# Altium PCB PCB1.PcbDoc
Units mil, origin at the board's own origin, x right, y up, seen from the top; angles counter-clockwise.
Board outline 4900 x 2550 mil, 2 copper layers (Top Layer, Bottom Layer); 55 components, 56 nets, 222 pads, 16 vias.
Unrouted connection lines stored in the file: 1.
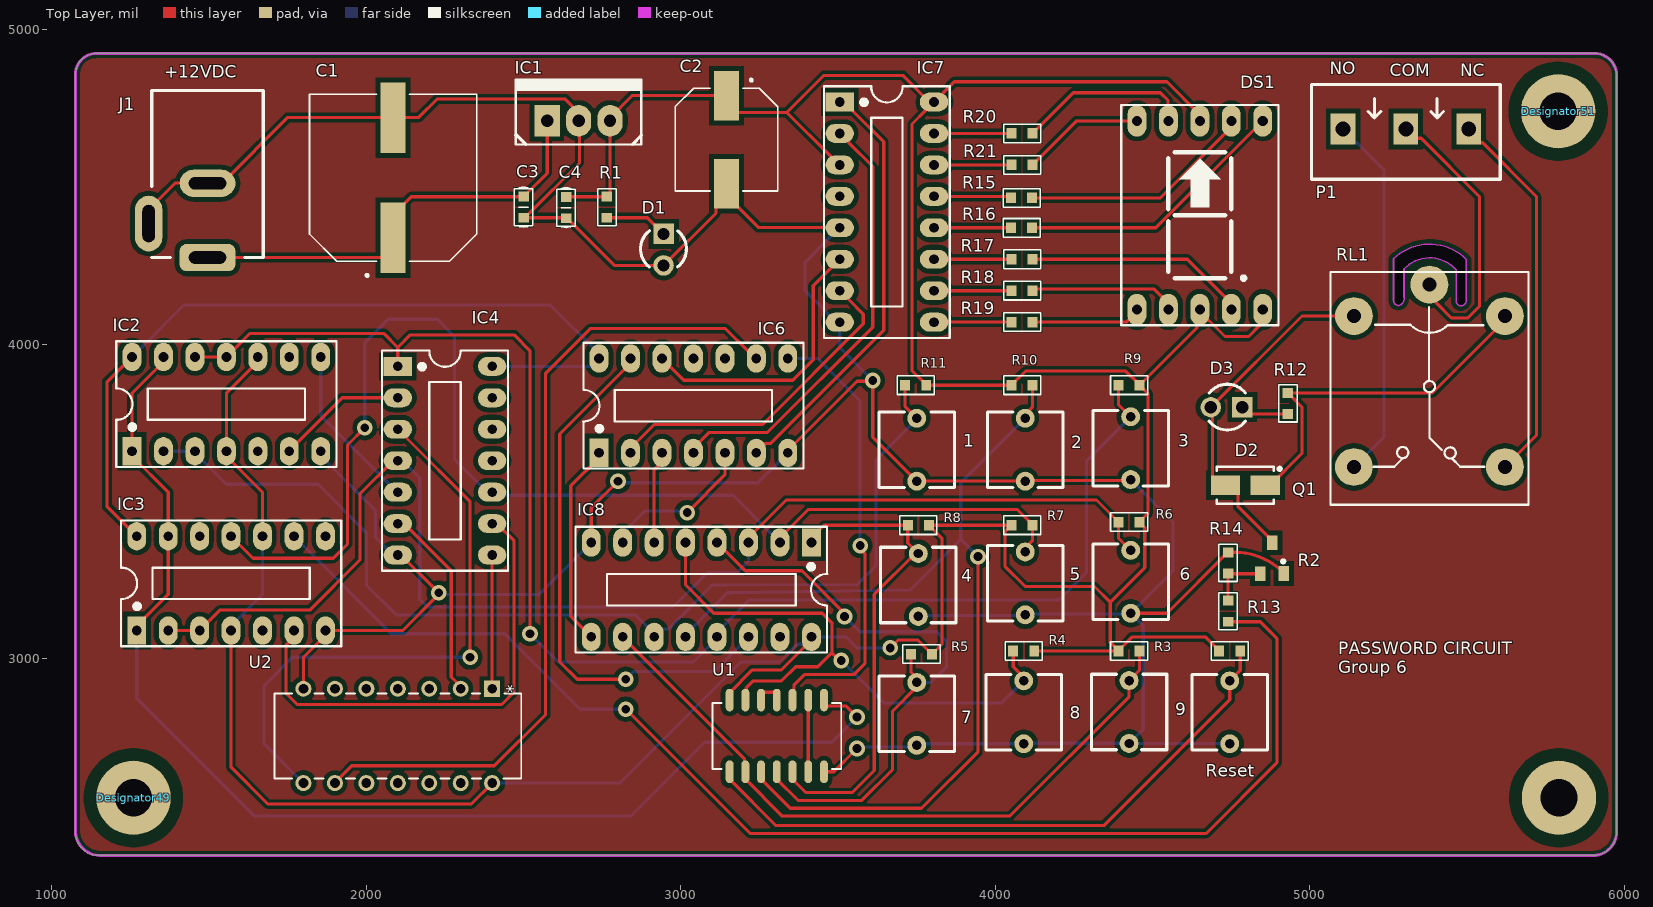
[diagram p0: Top Layer view]
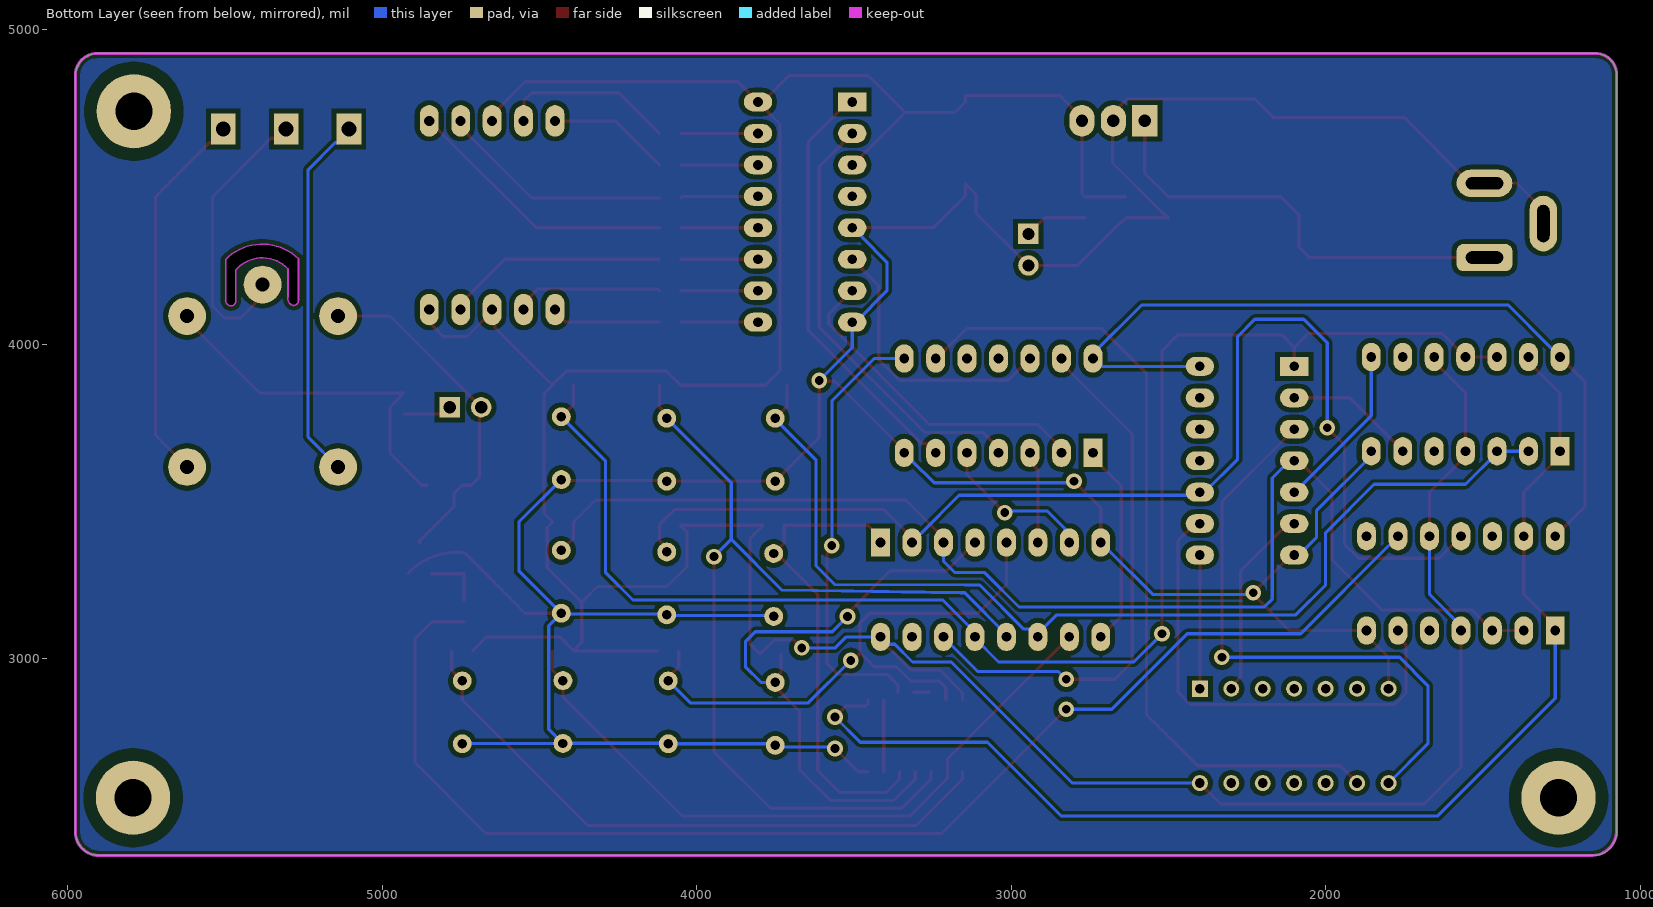
[diagram p1: Bottom Layer view, seen from below]
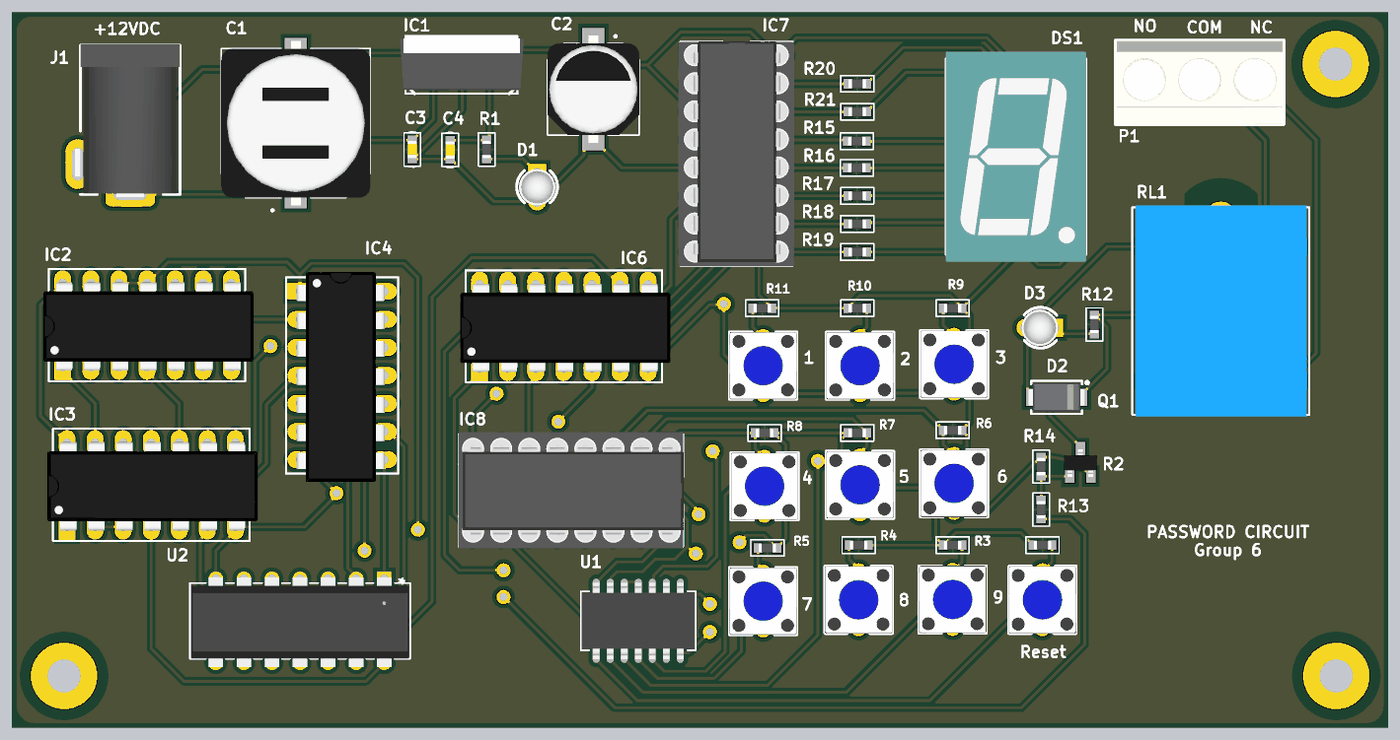
[diagram p2: 3D render of the assembled board from above, using the file's embedded part models]

## Layer stack, top to bottom
Top Solder: solder mask 0.4, Solder Resist, Dk 3.5
Top Layer: signal copper 1.4
Dielectric 1: dielectric 12.6, FR-4, Dk 4.8
Bottom Layer: signal copper 1.4
Bottom Solder: solder mask 0.4, Solder Resist, Dk 3.5

## Board outline
1075,2450 1075,4857.61 cw(c1142.39,4857.61) 1142.39,4925 5905,4925 cw(c5905,4855) 5975,4855 5975,2450 cw(c5900,2450) 5900,2375 1150,2375 cw(c1150,2450)
cut-out: 5265.7,4139.1 ccw(c5281.39,4139.1) 5281.39,4123.42 ccw(c5276.8,4145.64) 5299.02,4150.23 5299.02,4239.13 5299.07,4239.54 cw(c5380.81,4163.06) 5465.47,4236.3 5464.82,4235.74 5464.82,4139.98 ccw(c5480.86,4138.35) 5482.49,4122.31 ccw(c5479.54,4140.25) 5497.49,4143.2 5497.49,4269.95 5497.11,4269.95 ccw(c5380.45,4154.83) 5265.88,4272.03 5265.7,4272.03

## Design rules (kind name [scope] priority, off if disabled: settings)
Clearance [All] p1: gap=10 ignorepadtopadclearanceinfootprint=FALSE except(0: Arc-Hole Track-Hole SMDPad-Hole THPad-Hole Via-Hole Fill-Hole Poly-Hole Region-Hole Text-Hole; 15: SMDPad-SMDPad SMDPad-THPad SMDPad-Via SMDPad-Fill SMDPad-Poly SMDPad-Region THPad-THPad THPad-Via THPad-Fill THPad-Poly THPad-Region Via-Via Via-Fill Via-Poly Via-Region Fill-Fill Fill-Poly Fill-Region Poly-Poly Poly-Region Region-Region)
PolygonConnect [All] p1: connectstyle=Relief reliefconductorwidth=10 reliefentries=4 polygonreliefangle="90 Angle" airgapwidth=10
RoomDefinition Sheet1 [InComponentClass('Sheet1')] p1: confinementstyle=ConfineIn formatcopy=TRUE lockcomponents=FALSE outline 1080,2380 5970,2380 5970,4920 1080,4920
RoutingVias [All] p1: holewidth=28 width=50 viastyle="Through Hole" minholewidth=28 minwidth=50 maxholewidth=28 maxwidth=50
SolderMaskExpansion [All] p1: expansion=4 istentingtop=FALSE
Width [All] p1: maxlimit=20 minlimit=10 preferedwidth=10 minimp=50.000000 maximp=50.000000 favimp=50.000000
30 further rules are at their usual default settings.

## Classes and differential pairs
component class Sheet1: 1 2 3 4 5 6 7 8 9 C1 C2 C3 C4 D1 D2 D3 DS1 IC1 IC2 IC3 IC4 IC7 IC8 J1 P1 Q1 R1 R2 R3 R4 R5 R6 R7 R8 R9 R10 R11 R12 R13 R14 R15 R16 R17 R18 R19 R20 R21 Reset U1 U2

## Components (designator, comment, footprint, x,y, rotation, side; value= is the part's Value field where it differs from the comment)
1 "Button" Button 3750,3660 r90 top
2 "Button" Button 4095,3660 r90 top
3 "Button" Button 4430,3665 r90 top
4 "Button" Button 3755,3230 r90 top
5 "Button" Button 4095,3235 r90 top
6 "Button" Button 4430,3240 r90 top
7 "Button" Button 3750,2820 r90 top
8 "Button" Button 4090,2825 r90 top
9 "Button" Button 4425,2826.04 r90 top
C1 "EEEFK1V681AQ" CAP_EEEFK1V681AQ 2085,4530 r90 top
C2 "220uF" CAP_EEEFP1A681AP 3145,4651.01 r270 top
C3 "0.22uF" "C 0603" 2500,4436.01 r270 top
C4 "0.1uF" "C 0603" 2635,4434.48 r270 top
D1 "Led" "LED 3MM - red" 2945,4301.01 r270 top
D2 "Diode" "DO-214AC (SMA)" 4795,3552.05 r0 top
D3 "Led" "LED 3MM - red" 4735,3800 r180 top
Designator49 "Comment" SCREW/3.0/6.0 1259.47,2558.26 r0 top
Designator51 "Comment" SCREW/3.0/6.0 5789.08,4740.9 r0 top
DS1 "7SEG S" 7SEGS 4450,4110.55 r0 top value="LED 7S SEG"
IC1 "LM7805" QTO-220 2575,4711.01 r0 top
IC2 "74LS74" DIP14/W0.3 1255,3660 r0 top
IC3 "74LS74" DIP14/W0.3 1270,3090 r0 top
IC4 "7408" DIP14/W0.3 2100,3930 r270 top
IC6 "7404" DIP14/W0.3 2740,3655 r0 top
IC7 "7447" DIP16/W0.3 3505,4770.55 r270 top value="7447 , 74247"
IC8 "74147" DIP16/W0.3 3415,3370 r180 top
J1 "CON DC PWR" CONN/DC/PWR/5.0MM 1495,4275.83 r270 top (schematic designator CON1)
P1 "Domino 3" "DOMINO 3-5mm" 5505,4685 r180 top
Q1 "C1815" SOT23B 4880,3320 r0 top
R1 "330" "R 0603" 2765,4436.01 r90 top
R2 "510" "R 0603" 4745,3025 r180 top
R3 "510" "R 0603" 4425,3025 r180 top
R4 "510" "R 0603" 4090,3025 r0 top
R5 "510" "R 0603" 3765,3015 r0 top
R6 "510" "R 0603" 4425,3435 r0 top
R7 "510" "R 0603" 4085,3425 r180 top
R8 "510" "R 0603" 3755,3425 r0 top
R9 "510" "R 0603" 4425,3870 r0 top
R10 "510" "R 0603" 4085,3870 r180 top
R11 "510" "R 0603" 3746.54,3870 r0 top
R12 "300" "R 0603" 4930,3812.05 r90 top
R13 "3.9k" "R 0603" 4740,3151.54 r90 top
R14 "39k" "R 0603" 4740,3305 r270 top
R15 "100" "R 0603" 4083.46,4465.55 r0 top
R16 "100" "R 0603" 4083.46,4370.55 r0 top
R17 "100" "R 0603" 4085,4270.55 r0 top
R18 "100" "R 0603" 4085,4170.55 r0 top
R19 "100" "R 0603" 4085,4070.55 r0 top
R20 "100" "R 0603" 4085,4670.55 r0 top
R21 "100" "R 0603" 4085,4570.55 r0 top
Reset "Button" Button 4745,2825 r90 top
RL1 "Relay 10A/12V" RL_SPDT_10A 5380,4190 r270 top value="Relay SPDT, 10A, 12V"
U1 "74LS11" SO14NB_TEX 3305,2755 r90 top
U2 "CD4075BEG4" N14_TEX 2400,2905 r270 top
? "Comment" SCREW/3.0/6.0 5791.67,2558.32 r0 top

## Footprints (in the part's own frame and the unit in brackets; to place one, negate y for a bottom-side part, rotate by r counter-clockwise, add the part's x,y. Pads: shape width x height; smd on the part's side, far side on the other; paste and mask are expansions set on the pad)
7SEGS [mil] "DIP 10 Leads; Body 12 x 15 mm; Pitch 0.5 mm"
  oval 60x100 hole 32: 1(0,0) 2(100,0) 3(200,0) 4(300,0) 5(400,0) 6(400,600) 7(300,600) 8(200,600) 9(100,600) 10(0,600)
  silkscreen extent -50,-50 450,650, body extent -50,-75 450,675, height 316
Button [mil]
  round 60 hole 30: 1(-95,0) 2(105,0)
  silkscreen extent -115,-120 125,120, body extent -115,-120 125,120, height 165
"C 0603" [mm] "Chip Capacitor, 2-Leads, Body 1.6x0.8mm, IPC Medium Density"
  rect 0.8x0.85 smd: 1(-0.85,0) 2(0.85,0)
  silkscreen extent -1.6,-0.75 1.6,0.75, body extent -0.8,-0.43 0.8,0.43, height 0.81
CAP_EEEFK1V681AQ [mm]
  rect 5.7x2 smd: 1(-4.85,0) 2(4.85,0)
  silkscreen extent -8,-6.75 6.75,6.75, body extent -7.45,-6.75 7.45,6.75, height 13.5
CAP_EEEFP1A681AP [mm]
  rect 4x2 smd: 1(-3.55,0) 2(3.55,0)
  silkscreen extent -4.9,-4.15 4.15,4.15, body extent -4.85,-4.15 4.85,4.15, height 10.2
CONN/DC/PWR/5.0MM [mm]
  rrect50% 2.2x4.5 hole 1 slot 3 at 90 deg: 1(0,0)
  oval 2.2x4.5 hole 1 slot 3 at 90 deg: 2(-6,0)
  oval 4.5x2.2 hole 1 slot 3 at 0 deg: 3(-2.75,-4.75)
  silkscreen extent -13.5,-4.5 0,4.5, body extent -13.58,-5 0.25,4.5, height 11.02
DIP14/W0.3 [mil] "14PIN, W 300mil, Pin to pin 100mil"
  rect 60x90 hole 31: 1(0,0)
  oval 60x90 hole 31: 2(100,0) 3(200,0) 4(300,0) 5(400,0) 6(500,0) 7(600,0) 8(600,300) 9(500,300) 10(400,300) 11(300,300) 12(200,300) 13(100,300) 14(0,300)
  silkscreen extent -50,-50 650,350, body extent -70,-12 680,302, height 145
DIP16/W0.3 [mil] "16 PIN, W 300mil, Pin to pin 100mil"
  rect 60x90 hole 31: 1(0,0)
  oval 60x90 hole 31: 2(100,0) 3(200,0) 4(300,0) 5(400,0) 6(500,0) 7(600,0) 8(700,0) 9(700,300) 10(600,300) 11(500,300) 12(400,300) 13(300,300) 14(200,300) 15(100,300) 16(0,300)
  silkscreen extent -50,-50 750,350, body extent -52,-57 752,356, height 299
"DO-214AC (SMA)" [mm] "Molded Diode, 2-Leads, Body 4.3x2.7mm, IPC Medium Density"
  rect 2.35x1.55 smd: 1(-1.6,0) 2(1.6,0)
  silkscreen extent -2.3,-1.5 2.89,1.5, body extent -2.6,-1.3 2.6,1.3, height 2.4
"DOMINO 3-5mm" [mm]
  rect 2x2.5 hole 1.2: 1(0,0) 2(5.08,0) 3(10.147,0)
  silkscreen extent -2.54,-3.58 12.7,4.06, body extent -2.42,-3.51 12.58,3.99, height 10
"LED 3MM - red" [mil]
  rect 65x65 hole 39: 1(-50,0)
  round 65 hole 39: 2(50,0)
  silkscreen extent -60,-73 55,72, body extent -66,-65 64,65, height 207
N14_TEX [mil]
  rect 51x51 hole 31 mask+0: 1(0,0)
  round 51 hole 31 mask+0: 2(0,-100) 3(0,-200) 4(0,-300) 5(0,-400) 6(0,-500) 7(0,-600) 8(300,-600) 9(300,-500) 10(300,-400) 11(300,-300) 12(300,-200) 13(300,-100) 14(300,0)
  silkscreen extent 15,-692 285,93, body extent -5,-687 315,87, height 205
QTO-220 [mil] "TO-220 - 1-2-3"
  rect 80x100 hole 39: 1(0,0)
  oval 80x100 hole 39: 2(100,0) 3(200,0)
  silkscreen extent -100,-76 300,130, body extent -119,-64 322,121, height 905
"R 0603" [mm] "Chip Resistor, 2-Leads, Body 1.6x0.8mm, IPC Medium Density"
  rect 0.8x0.85 smd: 1(-0.85,0) 2(0.85,0)
  silkscreen extent -1.5,-0.75 1.5,0.75, body extent -0.8,-0.4 0.8,0.4, height 0.5
RL_SPDT_10A [mil] "Relay SPDT, 5 pin, 10A,W 650mil, L 800mil, H 800mil"
  round 120 hole 45: 1(0,0) 2(580,240) 3(580,-240) 4(100,-240) 5(100,240)
  silkscreen extent -40,-315 700,315, body extent -46,-304 706,306, height 602
SCREW/3.0/6.0 [mm]
  round 6 hole 3: 1(0,0)
  Top Layer pour cut-out: -4,0 -3.696,1.531 -2.828,2.828 -1.531,3.695 0,4 0,4 1.531,3.695 2.828,2.828 3.695,1.531 4,0 4,0 3.696,-1.531 2.828,-2.828 1.531,-3.696 0,-4 0,-4 -1.531,-3.696 -2.828,-2.828 -3.696,-1.531 -4,0
  Bottom Layer pour cut-out: -4,0 -3.696,1.531 -2.828,2.828 -1.531,3.695 0,4 0,4 1.531,3.695 2.828,2.828 3.695,1.531 4,0 4,0 3.696,-1.531 2.828,-2.828 1.531,-3.696 0,-4 0,-4 -1.531,-3.696 -2.828,-2.828 -3.696,-1.531 -4,0
SO14NB_TEX [mil]
  oval 72x25 smd paste+0 mask+0: 1(-114,150) 2(-114,100) 3(-114,50) 4(-114,0) 5(-114,-50) 6(-114,-100) 7(-114,-150) 8(114,-150) 9(114,-100) 10(114,-50) 11(114,0) 12(114,50) 13(114,100) 14(114,150)
  silkscreen extent -105,-205 105,205, body extent -136,-200 136,200, height 67
SOT23B [mm] "SOT 23B"
  rect 0.85x1.2 smd: 1(0.94,-1.245) 2(0,1.25) 3(-0.95,-1.25)
  silkscreen extent 0.77,-0.38 1.02,-0.13, body extent -1.5,-1.3 1.5,1.2, height 1.06

## Part data
1 2 3 4 5 6 7 8 9 Reset: library part "SW SPST", "Tact switch 2 pin"
C1: "ìº¡ ì•Œë£¨ë¯¸ëŠ„ Lytic 680uF 35V 20 % (12.5 X 13.5mm) SMD 1100mA 5000h 105C ìžë™ì°¨ T / R", PACKAGE="RADIAL-2 Panasonic", Availability="Not in stock", Check_prices=https://www.snapeda.com/parts/EEEFK1V681AQ/Panasonic/view-part/4273057/?ref=eda, MF=Panasonic, MP=EEEFK1V681AQ, Price=None, SnapEDA_Link=https://www.snapeda.com/parts/EEEFK1V681AQ/Panasonic/view-part/4273057/?ref=snap
C2: library part EEEFP1A681AP, "CAPACITOR ALUM ELEC, 680UF, 10V, 20%, SMD; Product Range:PANASONIC - FP Series; Capacitance:680ÂµF; Capacitance Tolerance:Â± 20%; Voltage Rating:10V; Diameter:8mm; ESR:0.08ohm; Height:10.2mm; Life Time @ Temperature:2000 hours @ 105Â°C ;RoHS Compliant: Yes", PACKAGE="RADIAL-2 Panasonic", Availability="In Stock", Check_prices=https://www.snapeda.com/parts/EEE-FP1A681AP/Panasonic/view-part/?ref=eda, MF=Panasonic, MP=EEE-FP1A681AP, Price=None, Purchase-URL=https://pricing.snapeda.com/search/part/EEE-FP1A681AP/?ref=eda, SnapEDA_Link=https://www.snapeda.com/parts/EEE-FP1A681AP/Panasonic/view-part/?ref=snap
C3 C4: library part "Capacitor NP", "Capacitor non-pol"
D1 D3: "Typical LED"
D2: "Default Diode"
DS1: library part LED7S, "Single 7 Seg Dipslay"
IC1: library part LM78xx, "On ap +, from + 5 to + 24VDC"
IC2 IC3: library part 7474, "Dual D Flip-Flop", Copyright by=VanDungEvn@Gmail.com
IC4: "Quad 2-Input AND Gate"
IC6: "Hex Inverter", Code_IPC=SOIC127P600-14, ComponentLink1Description="Manufacturer Link", ComponentLink1URL=http://www.national.com/, ComponentLink2Description=Datasheet, ComponentLink2URL=http://www.fairchildsemi.com/ds/74/74F04.pdf
IC7: "BCD to 7-Segment Decoder/Driver"
IC8: "10-Line to 4-Line Priority Encoder", Copyright by=VanDungEvn@Gmail.com
J1: "DC input connector"
P1: "Domino 3-Pin", LatestRevisionDate=17-Jul-2002, LatestRevisionNote="Re-released for DXP Platform.", Publisher="Altium Limited"
Q1: "NPN 600mW, ECB"
R1 R2 R3 R4 R5 R6 R7 R8 R9 R10 R11 R12 R13 R14 R15 R16 R17 R18 R19 R20 R21: library part Resistor, "Resistor"
RL1: library part "Relay 1", "Relay SPDT,10A - 12VDC 5 Pin"
U1 U2: "No Description Available", Mfr_Name="Texas Instruments", Copyright="Copyright (C) 2021 Ultra Librarian. All rights reserved.", RefDes=RefDes, TYPE=DEV
  U1: Manufacturer_Part_Number=74LS11
  U2: Manufacturer_Part_Number=CD4075BEG4

## Via types
v1: diameter 50, hole 28, Top Layer to Bottom Layer, 16 vias

## Nets (pads, with @x,y where several pads share a name; then routed paths per layer and width w, separated by ;. In a path a pad name is that pad's centre, name@x,y a point inside that pad or via, vN(x,y) a via of type N, cw(c..) or ccw(c..) an arc to the next point about the centre after c; other vN are vias at no path point)
5V: C2.1 C4.1 DS1.3 DS1.5 DS1.8 IC1.3 IC2.4 IC2.10 IC3.4 IC3.10 IC7.3 IC7.16 IC8.16 R1.2 R2.2 R3.2 R4.2 R5.2 R6.2 R7.2 R8.2 R9.2 R10.2 R11.2 U1.14 U2.14 | length 12131.4
  Top Layer w10: IC3.4 1570,2655 1685.86,2539.14 2334.14,2539.14 U2.14 ; IC2.10 1655,3945 1555,3845 IC2.4 1555,3645 1670,3530 IC3.10 ; C4.1 2636.54,4469.48 R1.2 2775,4479.48 IC1.3 2775,4721.01 2844.76,4790.78 C2.1 3145,4771.41 3179.37,4737.04 3337.04,4737.04 ; U1.14 3155,2892.5 3227.5,2965 3320,2965 3415,3060 IC8.16 ; IC7.3 3503.53,4570.55 3474.95,4599.13 3337.04,4737.04 ; v1(3665.82,3035) 3690.82,3060 3753.06,3060 3786.33,3026.73 3787.72,3026.73 R5.2@3798.46,3015.98 ; R5.2 R5.2@3798.46,3015.98 ; R5.2@3798.46,3015.58 R5.2@3798.46,3015.98 ; IC7.16 IC7.16@3803.53,4770.55 ; IC7.16@3806.47,4770.55 3834.32,4798.4 3834.32,4799.87 3869.45,4835 4545.55,4835 4650,4730.55 DS1.8 ; R4.2 R3.2 R3.2@4391.54,3025.98 ; DS1.3@4650,4104.08 4678.12,4075.96 4679.05,4075.96 4730.01,4025 4805,4025 4840.43,4060.43 4840.43,4100.98 DS1.5 ; DS1.3 4640.43,4100.98 4640.43,4051.97 4470.2,3881.73 4469.21,3881.73 R9.2@4458.46,3870.98 ; R2.2 4711.54,3025.98 4667.52,3070 4435.55,3070 R3.2@4391.54,3025.98 ; 3337.04,4737.04 3455,4855 3705.55,4855 3790,4770.55 IC7.16@3803.53,4770.55 ; R5.2@3798.46,3015.98 3809.21,3026.73 3810.2,3026.73 3830,3046.54 3830,3383.46 3800.2,3413.27 3799.21,3413.27 3788.46,3424.02 R8.2 R7.2 4051.54,3424.02 4040.79,3413.27 4039.8,3413.27 4030,3403.46 4030,3295 4095,3230 4315,3230 4365,3180 ; IC7.16@3803.53,4770.55 3780.43,4747.45 3780.43,4745.98 3735,4700.55 3735,3915.98 3780,3870.98 R11.2 R10.2 4051.54,3870.98 4095.55,3915 4414.45,3915 R9.2@4458.46,3870.98 ; 4365,3180 4365,3052.52 R3.2@4391.54,3025.98 ; 4365,3180 4475,3290 4475,3417.48 4458.46,3434.02 R6.2 4459.23,3435.77 4459.23,3436.75 4485,3462.52 4485,3843.46 4470.2,3858.27 4469.21,3858.27 4458.46,3869.02 R9.2 R9.2@4458.46,3870.98
  Bottom Layer w10: IC3.4 1570,3105 1670,3205 IC3.10 ; U2.14 2805,2605 3190,2990 3313.64,2990 3370,3046.36 3391.9,3046.36 3415,3069.46 IC8.16 3523.64,3070 3558.64,3035 v1(3665.82,3035)
GND: 1.1 2.1 3.1 4.1 5.1 6.1 7.1 8.1 9.1 C1.2 C2.2 C3.2 C4.2 D1.2 IC1.2 IC2.7 IC3.7 IC4.7 IC6.7 IC7.5 IC7.8 IC8.8 J1.2 J1.3 Q1.1 R14.1 Reset.1 U1.7 U2.7 | length 11537.2
  Top Layer w10: J1.3 1307.99,4428.9 1391.72,4512.64 J1.2@1494.41,4512.64 ; J1.2@1495.59,4512.64 1541.33,4512.64 1750.23,4721.53 C1.2@2084.41,4721.53 ; U2.7 1800,3005 1870,3075 IC3.7 2115,3090 2230,3205 v1(2230,3210) 2110,3330 IC4.7 ; C1.2@2085.59,4721.53 2167,4721.53 2226.06,4780.59 2631.06,4780.59 2675,4736.64 IC1.2 2677.59,4708.42 2677.59,4576.56 2514.32,4413.3 2511.22,4413.3 C3.2@2500.47,4402.55 ; C3.2 2633.46,4402.55 C4.2 2645.75,4390.26 2649.32,4390.26 2788.58,4251.01 D1.2 ; IC8.8 2715,3480 v1(2800,3565) ; D1.2@2945.47,4251.01 3111.69,4417.23 3111.69,4477.47 C2.2@3145,4510.78 ; C2.2 C2.2@3145,4510.78 ; IC6.7 3340,3662.5 3560,3882.5 3607.5,3882.5 v1(3610,3885) 3610,3705 1.1 2.1 4097.5,3567.5 4427.5,3567.5 3.1 ; U1.7 3486,2641 v1(3560,2715) ; IC7.5@3504.41,4371.14 3247.38,4371.14 3181.01,4437.51 3179.37,4437.51 3145,4471.88 C2.2@3145,4510.78 ; 6.1 4545.55,3145 4739.02,3338.46 R14.1 4751.73,3339.14 cw(c4758.69,3115.77) 4904.64,3285 4905.27,3285 Q1.1
  Bottom Layer w10: IC2.7 1855,3645 2029.36,3470.64 2029.36,3385.64 2085,3330 IC4.7 ; v1(2230,3210) 2235,3205 2550,3205 2690.43,3345.43 2691.9,3345.43 2715,3368.53 IC8.8 ; v1(2800,3565) 2805,3560 3245,3560 3315.43,3630.43 3316.9,3630.43 3340,3653.53 IC6.7 ; IC7.5 3503.53,4370.55 3475.41,4342.43 3475.41,4341.5 3395,4261.09 3395,4170 3494.45,4070.55 IC7.8 3505,3990 v1(3610,3885) ; v1(3560,2715) 3565,2720 3745,2720 7.1 3755,2730 8.1 ; 4.1 3757.5,3137.5 4092.5,3137.5 5.1 4097.5,3142.5 4427.5,3142.5 6.1 ; 8.1@4090,2711.04 4110.8,2731.84 4423.07,2731.84 cw(c4423.07,2729.11) 9.1 ; 3.1 4565,3435 4565,3280 6.1 ; Reset.1@4742.83,2731.04 cw(c4742.83,2728.32) 4744.76,2730.24 Reset.1 4742.83,2730 4741.8,2731.04 9.1 ; 9.1 4470,2776.04 4470,3105 6.1
Net1_2: 1.2 IC2.2 IC2.3 IC8.11 R11.1 | length 3342.5
  Top Layer w10: R11.1 3713.07,3801.93 1.2
  Bottom Layer w10: IC2.2 IC2.3 1455,3655.49 1555.49,3555 1846.17,3555 2000,3401.17 2000,3235 2095,3140 2855,3140 2880.13,3114.87 IC8.11@2915,3080 ; IC8.11 2915,3071.47 2938.1,3094.57 2959.57,3094.57 3100.03,3235.03 3147.22,3235.03 3561.61,3236.92 3564.54,3239.85 3620.05,3295.35 3620.05,3631.92 3750,3761.87 1.2
Net2_2: 2.2 IC8.12 R10.1 U1.3 | length 3118.2
  Top Layer w10: U1.3 3255,2617.5 3347.5,2525 3765,2525 3945,2705 v1(3945,3325) ; 2.2@4090,3765 2.2 4095,3778.53 4118.46,3801.99 R10.1
  Bottom Layer w10: IC8.12 3015,3077.62 3147.38,3210 3160,3210 3728.5,3218.5 3890,3380 ; v1(3945,3325) 3890,3380 ; 2.2 3890,3560 3890,3380
Net3_2: 3.2 IC2.11 IC2.12 IC4.1 IC8.13 R9.1 | length 4718.8
  Top Layer w10: IC2.12 IC2.11 1555,3961.47 1578.1,3984.57 1579.57,3984.57 1630,4035 2055,4035 2100,3990 ; IC4.1 2100,3990 ; v1(2520,3080) 2520,3980 2470,4030 2140,4030 2100,3990 ; R9.1 4391.54,3808.46 3.2
  Bottom Layer w10: v1(2520,3080) 2610,2990 3040,2990 3115,3065 IC8.13 3115,3085 3217.28,3187.28 4202.28,3187.28 4290,3275 4290,3630 3.2
Net4_2: 4.2 IC8.1 R8.1 U1.5 | length 1525.9
  Top Layer w10: U1.5 3355,2617.5 3397.5,2575 3545,2575 3615,2645 3615,3205 3745,3335 4.2 3721.54,3368.46 R8.1 3455,3425 3415,3385 IC8.1
Net5_2: 5.2 IC3.11 IC3.12 IC4.10 IC8.2 R7.1 | length 3912.5
  Top Layer w10: IC3.11 1570,3388.53 1598.12,3360.41 1599.05,3360.41 1639.46,3320 1895,3320 1940,3365 1940,3680 v1(1995,3735) ; IC8.2 3315,3385 3405,3475 4069.45,3475 4118.46,3425.98 R7.1 4118.46,3376.99 4095,3353.53 5.2
  Bottom Layer w10: v1(1995,3735) 1995,4005 2070,4080 2225,4080 2280,4025 2280,3635 IC4.10@2385,3530 ; IC4.10 2409.57,3520.43 2445.42,3520.43 2445.86,3520 3165.54,3520 3285.95,3399.59 3286.88,3399.59 3315,3371.47 IC8.2
Net6_2: 6.2 IC3.2 IC3.3 IC4.4 IC8.3 R6.1 | length 4138.8
  Top Layer w10: IC3.2 IC3.3 1470,3091.47 1498.58,3120.05 1533.53,3155 1820,3155 1980,3315 1980,3525 2085,3630 IC4.4 ; IC8.3 3215,3385 3335,3505 4321.54,3505 R6.1 4391.54,3383.46 6.2 ; R6.1@4388.46,3435 R6.1@4388.46,3435.98
  Bottom Layer w10: IC4.4 2115,3630 2170,3575 2170,3190 2195,3165 2975,3165 3085,3275 3180,3275 3215,3310 IC8.3 3195.9,3350.9 IC8.3@3193.18,3348.18
Net7_2: 7.2 IC8.4 R5.1 U1.4 | length 1915.5
  Top Layer w10: IC8.4 3115,3368.53 3138.1,3345.43 3139.57,3345.43 3205,3280 3385,3280 3520,3145 v1(3520,3135) ; U1.4 3305,2617.5 3372.5,2550 3575,2550 3672.72,2647.72 3672.72,2833.75 7.2@3750,2911.04 ; R5.1 3731.54,2956.99 3750,2938.53 7.2
  Bottom Layer w10: v1(3520,3135) 3568.83,3086.17 3813.83,3086.17 3845,3055 3845,2975 3795,2925 7.2
Net8_2: 8.2 IC8.5 R4.1 U1.13 | length 1913.5
  Top Layer w10: IC8.5 3015,3235 3105,3145 3450,3145 3480,3115 3480,3020 ; U1.13 3207.87,2871.87 3207.87,2907.87 3222.01,2922.01 3230,2930 3320,2930 3365,2975 3405.57,2975 ; 3405.61,2975 3435,2975 3480,3020 ; v1(3510,2995) 3505,2995 3480,3020 ; R4.1 4056.54,2974.5 8.2@4095,2936.04
  Bottom Layer w10: v1(3510,2995) 3645,2860 4020,2860 8.2
Net9_2: 9.2 IC8.10 R3.1 U1.2 | length 2199
  Top Layer w10: IC8.10 2815,3068.53 3202.57,2680.96 3202.57,2619.93 3322.5,2500 4045,2500 4425,2880 9.2 4458.46,2964.5 R3.1
NetC1_1: C1.1 C3.1 IC1.1 J1.1 | length 1418
  Top Layer w10: J1.1 2050.63,4275.83 2085,4310.2 C1.1 2085,4411.89 2142.59,4469.48 C3.1 2500.98,4469.48 2511.73,4480.23 2511.73,4481.21 2575,4544.48 IC1.1
NetD1_1: D1.1 R1.1 | length 201.3
  Top Layer w10: R1.1 2893.46,4402.55 D1.1
NetD2_1: D2.1 D3.2 Q1.2 RL1.4 | length 1103.8
  Top Layer w10: Q1.2 4880,3376.1 4771,3485.1 4771,3526.54 4745.49,3552.05 4716.26,3552.05 4690.75,3577.56 4690.75,3794.25 D3.2 4975,4090 RL1.4
NetD2_2: D2.2 R12.2 RL1.5 | length 1164.4
  Top Layer w10: D2.2 4873.74,3552.05 4975,3653.31 4975,3800.51 4941.73,3833.78 4941.73,3834.77 R12.2@4930.98,3845.51 ; R12.2 R12.2@4930.98,3845.51 ; RL1.5@5626.47,4083.53 5388.46,3845.51 R12.2@4930.98,3845.51
NetD3_1: D3.1 R12.1 | length 153.9
  Top Layer w10: D3.1 4806.41,3778.59 R12.1
NetDS1_1: DS1.1 R19.2 | length 351.9
  Top Layer w10: R19.2 4416.47,4070.55 4450,4104.08 DS1.1
NetDS1_2: DS1.2 R18.2 | length 472.2
  Top Layer w10: R18.2 4123.46,4175.55 4505,4175.55 4550,4130.55 DS1.2
NetDS1_4: DS1.4 R17.2 | length 709.5
  Top Layer w10: R17.2 4610,4270.55 4750,4130.55 DS1.4
NetDS1_6: DS1.6 R16.2 | length 877.7
  Top Layer w10: R16.2 4510,4370.55 4820.43,4680.98 4826.9,4680.98 4850,4704.08 DS1.6
NetDS1_7: DS1.7 R15.2 | length 746.3
  Top Layer w10: R15.2 4525,4465.55 4750,4690.55 DS1.7
NetDS1_9: DS1.9 R20.2 | length 560
  Top Layer w10: R20.2 4118.46,4671.53 4129.21,4682.28 4130.2,4682.28 4247.91,4800 4524.14,4800 4548.59,4775.55 4548.59,4711.96 DS1.9
NetDS1_10: DS1.10 R21.2 | length 390.1
  Top Layer w10: R21.2 4118.46,4571.53 4129.21,4582.28 4130.2,4582.28 4258.46,4710.55 DS1.10
NetIC2_1: IC2.1 IC2.13 IC3.1 IC3.13 U1.8 | length 3925.4
  Top Layer w10: IC3.1 1270,3105 1370,3205 IC3.13 1370,3530 1255,3645 IC2.1 1255,3845 1355,3945 IC2.13 ; U1.8 3455,2857.43 3461.93,2850.5 3524.5,2850.5 v1(3560,2815)
  Bottom Layer w10: IC3.1 1270,2875 1645,2500 2840,2500 3075,2735 3480,2735 v1(3560,2815)
NetIC2_6: IC2.6 IC4.2 | length 416.3
  Top Layer w10: IC2.6 1755,3661.47 1923.53,3830 IC4.2
NetIC2_8: IC2.8 IC4.5 | length 532.3
  Bottom Layer w10: IC2.8 1855,3773.53 2098.53,3530 IC4.5
NetIC3_6: IC3.6 IC4.9 | length 1539.2
  Top Layer w10: IC3.6 1770,3069.64 1745,3044.64 1745,2890 1780,2855 2430,2855 2470,2895 2470,3375 2415,3430 IC4.9
NetIC3_9: IC3.9 R13.1 | length 4172.9
  Top Layer w10: v1@2831.75,2833.25 3220,2445 4670,2445 4895,2670 4895,3065 4841.93,3118.07 R13.1
  Bottom Layer w10: IC3.9 1770,3388.53 1798.12,3360.41 1799.05,3360.41 2079.46,3080 2440,3080 2680,2840 v1(2825,2840)
NetIC4_3: IC4.3 U2.8 | length 1875.2
  Top Layer w10: IC4.3 2101.47,3730 2124.57,3706.9 2124.57,3705.43 2330,3500 v1(2330,3005)
  Bottom Layer w10: U2.8 1675,2730 1675,2915 1765,3005 v1(2330,3005)
NetIC4_6: IC4.6 U2.2 | length 619.6
  Top Layer w10: IC4.6 2120,3430 2270,3280 2270,2942.28 2300,2912.28 U2.2
NetIC4_8: IC4.8 U2.1 | length 425
  Top Layer w10: U2.1 IC4.8
NetIC6_1: IC6.1 IC8.9 | length 649.2
  Top Layer w10: IC8.9 2650,3135 2650,3550 2740,3640 IC6.1
NetIC6_2: IC6.2 IC7.7 | length 1056.1
  Top Layer w10: IC6.2 2840,3670 2915,3745 3260,3745 3580,4065 3580,4096.09 3534.59,4141.5 3534.59,4142.43 3506.47,4170.55 IC7.7
NetIC6_3: IC6.3 IC8.6 | length 295.4
  Top Layer w10: IC8.6 2915,3601.47 2940,3626.47 IC6.3
NetIC6_4: IC6.4 IC7.2 | length 1404.5
  Top Layer w10: IC6.4 3040,3670 3090,3720 3275.25,3720 3610,4054.75 3610,4565.55 3534.32,4641.23 3534.32,4642.7 3506.47,4670.55 IC7.2
NetIC6_5: IC6.5 IC8.7 | length 505.8
  Top Layer w10: v1(3020,3465) 3140,3585 IC6.5
  Bottom Layer w10: IC8.7 2815,3398.53 2829.32,3412.85 2829.32,3414.32 2885,3470 3015,3470 v1(3020,3465)
NetIC6_6: IC6.6 IC7.1 | length 1359.7
  Top Layer w10: IC6.6 3240,3656.47 3267.85,3684.32 3284.32,3684.32 3645,4045 3645,4643.66 3545,4743.66 3545,4745.55 3520,4770.55 IC7.1
NetIC6_8: IC6.8 U1.10 | length 1403.6
  Top Layer w10: U1.10@3360,2894 3360,2917.5 3392.5,2950 3550,2950 3585,2985 3585,3334.18 3570,3349.18 v1(3570,3360)
  Bottom Layer w10: IC6.8 3435,3955 3570,3820 v1(3570,3360)
NetIC6_9: IC6.9 U2.9 | length 2615.3
  Top Layer w10: U2.9 1900,2606.64 1953.45,2660.09 2406.97,2660.09 2570,2823.12 2570,3908.12 2711.88,4050 3142.06,4050 3212.49,3979.57 3216.9,3979.57 3240,3956.47 IC6.9
NetIC6_12: IC6.12 IC7.6 | length 894.6
  Top Layer w10: IC6.12 2940,3953.53 2963.1,3930.43 2964.57,3930.43 3009.34,3885.66 3355.81,3885.66 3420.81,3950.66 3420.81,4186.21 3481.24,4246.65 3481.24,4248.12 3499.67,4266.54 3499.67,4270.55 IC7.6@3504.34,4271.21
NetIC6_13: IC6.13 IC8.14 | length 1737.8
  Top Layer w10: v1(2825,2935) 2670,2935 2615,2990 2615,3715 2840,3940 IC6.13
  Bottom Layer w10: v1(2825,2935) 2850,2960 3106.47,2960 3215,3068.53 IC8.14
NetIC7_9: IC7.9 R19.1 | length 246.5
  Top Layer w10: IC7.9 R19.1
NetIC7_10: IC7.10 R18.1 | length 246.5
  Top Layer w10: IC7.10 R18.1
NetIC7_11: IC7.11 R17.1 | length 246.5
  Top Layer w10: IC7.11 R17.1
NetIC7_12: IC7.12 R16.1 | length 245
  Top Layer w10: IC7.12 R16.1
NetIC7_13: IC7.13 R15.1 | length 247.1
  Top Layer w10: IC7.13 4045,4470.55 R15.1
NetIC7_14: IC7.14 R21.1 | length 246.5
  Top Layer w10: IC7.14 R21.1
NetIC7_15: IC7.15 R20.1 | length 246.5
  Top Layer w10: IC7.15 R20.1
NetP1_1: P1.1 RL1.2 | length 1219
  Top Layer w10: P1.1@5499.51,4690.49 5499.51,4680.65 5539.37,4640.79 5549.21,4640.79 5720,4470 5720,3710 RL1.2
NetP1_2: P1.2 RL1.1 | length 912.3
  Top Layer w10: P1.2 5334.68,4655.32 5353.51,4655.32 5539.22,4469.61 5539.22,4121 5501.82,4083.6 5449.74,4083.6 5401.05,4132.29 5401.05,4168.95 RL1.1
NetP1_3: P1.3 RL1.3 | length 1173.8
  Bottom Layer w10: P1.3 5105.5,4675.16 5139.87,4640.79 5149.71,4640.79 5235,4555.5 5235,3705 RL1.3
NetQ1_3: Q1.3 R13.2 R14.2 | length 189.4
  Top Layer w10: R13.2 R14.2 4740.75,3270.79 Q1.3
NetR2_1: R2.1 Reset.2 U1.1 | length 2009.1
  Top Layer w10: U1.1 3155,2617.5 3302.5,2470 4345,2470 4745,2870 Reset.2 4778.46,2963.46 R2.1
NetU1_6: U1.6 U1.9 | length 228
  Top Layer w10: U1.6 U1.9
NetU1_11: U1.11 U1.12 | length 50
  Top Layer w10: U1.12@3260,2894 U1.11@3310,2894
VCC: IC2.14 IC3.14 IC4.14 IC6.14 | length 2628
  Top Layer w10: IC2.14 1255,3958.53 1227.15,3930.68 1225.68,3930.68 1175,3880 1175,3485 IC3.14
  Bottom Layer w10: IC2.14 1255,3961.47 1283.12,3989.59 1284.05,3989.59 1419.46,4125 2585,4125 2740,3970 IC6.14 2740,3953.53 2716.47,3930 IC4.14
pads on no net: ?.1 Designator49.1 Designator51.1 IC2.5 IC2.9 IC3.5 IC3.8 IC4.11 IC4.12 IC4.13 IC6.10 IC6.11 IC7.4 IC8.15 U2.3 U2.4 U2.5 U2.6 U2.10 U2.11 U2.12 U2.13

## Polygon pours and split planes (outlines as drawn)
no net on Top Layer "TOP_GND" (solid, pour order 1): 1081.67,4923.53 1081.88,4923.32 5981.22,4923.32 5981.22,2379.76 5977.52,2376.06 1078.94,2376.06 1078.94,4920.8
no net on Bottom Layer "TOP_GND" (solid, pour order 0): 1086.34,4934.41 1097.43,4923.32 5981.22,4923.32 5981.22,2387.15 5984.91,2383.46 5977.52,2376.06 1078.94,2376.06 1078.94,4920.87 1078.98,4920.83 1081.67,4923.53 1097.84,4923.53

## Keep-outs
Keep-Out Layer:
  lines w5: 5265.7,4272.03 5265.7,4139.1 ccw(c5281.39,4139.1) 5281.39,4123.42 ccw(c5276.8,4145.64) 5299.02,4150.23 5299.02,4239.13 ; 5265.88,4272.03 cw(c5380.45,4154.83) 5497.11,4269.96 ; 5299.07,4239.54 cw(c5380.82,4163.06) 5465.47,4236.3 ; 5464.82,4235.74 5464.82,4139.98 ccw(c5480.86,4138.35) 5482.49,4122.31 ccw(c5479.54,4140.25) 5497.49,4143.2 5497.49,4269.95
  lines w10: 1075,2450 ccw(c1153.96,2453.97) 1150,2375 5900,2375 ccw(c5900,2450) 5975,2450 5975,4855 ccw(c5905,4855) 5905,4925 1220,4925 1142.39,4925 ccw(c1142.39,4857.61) 1075,4857.61 1075,2450

## Silkscreen, mask and mechanical layers (free items; w line width, h text height)
Top Overlay:
  text "NO" at 5063,4858 h40
  text "COM" at 5253,4853 h40
  text "NC" at 5478,4853 h40
  text "+12VDC" at 1358,4848 h40
  text "PASSWORD CIRCUIT / Group 6" at 5090.43,2955 h40

## Text inside footprints (layer, text, board x,y; h text height)
U2: Top Overlay "*" at 2430.5,2917.5 h40 r270; Mechanical 13 "*" at 2375,2887.5 h50 r270